# Altium PCB FlowSense-TX.PcbDoc
Units mil, origin at the board's own origin, x right, y up, seen from the top; angles counter-clockwise.
Board outline 1180 x 1005 mil, 2 copper layers (L1, L2), stack 62.8 mil thick; 40 components, 27 nets, 157 pads, 25 vias.
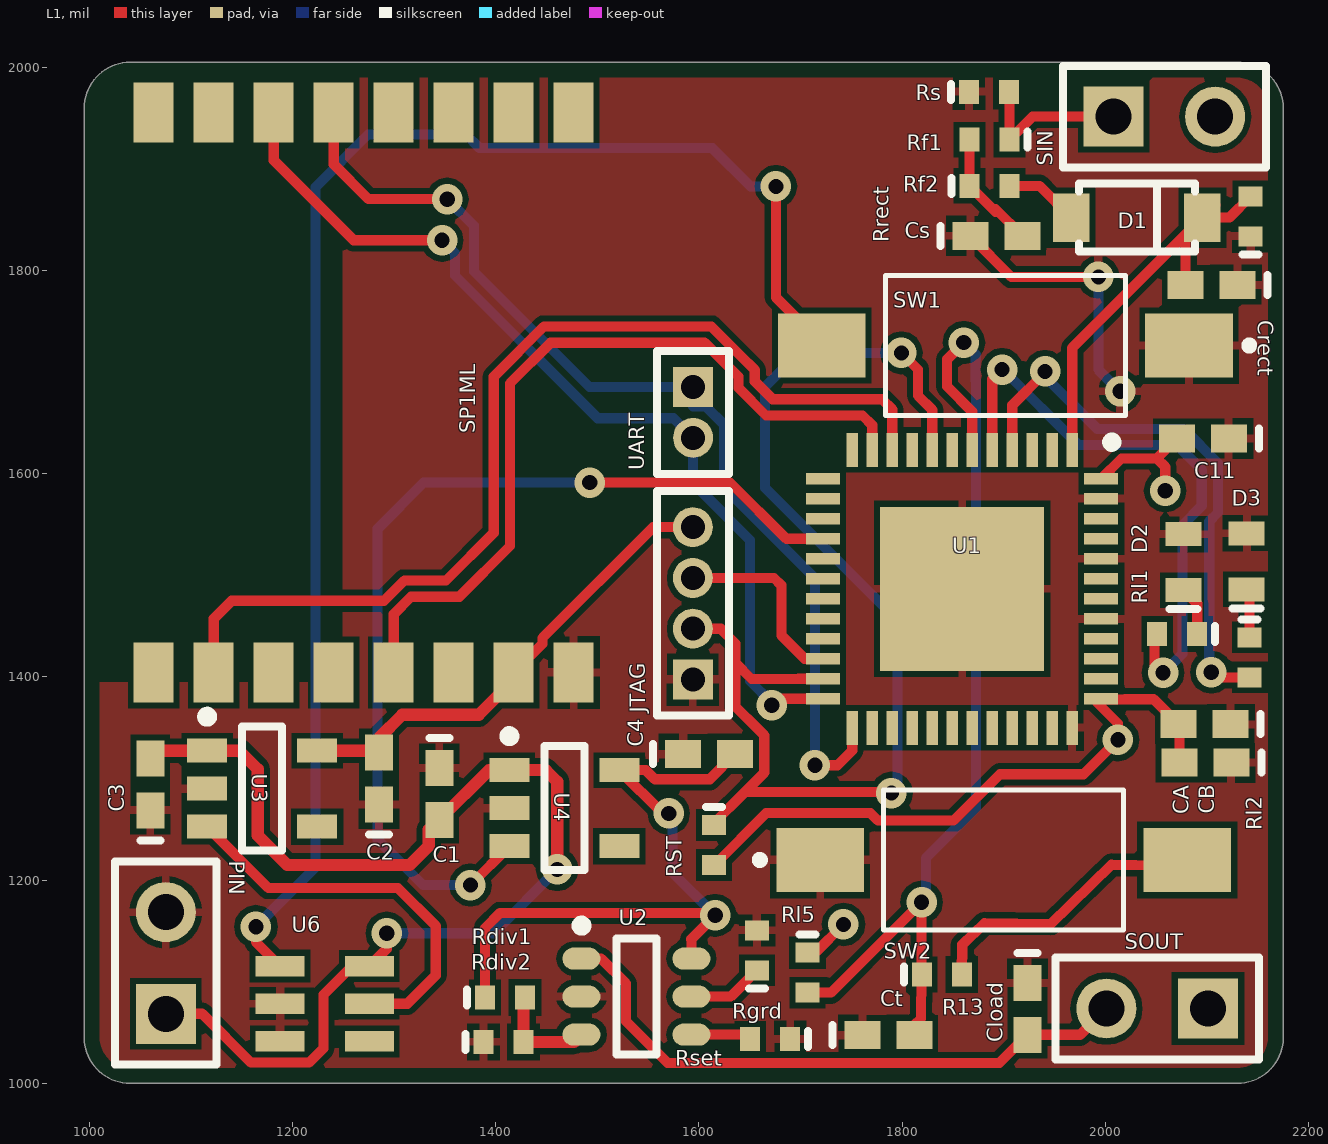
[diagram p0: L1 view]
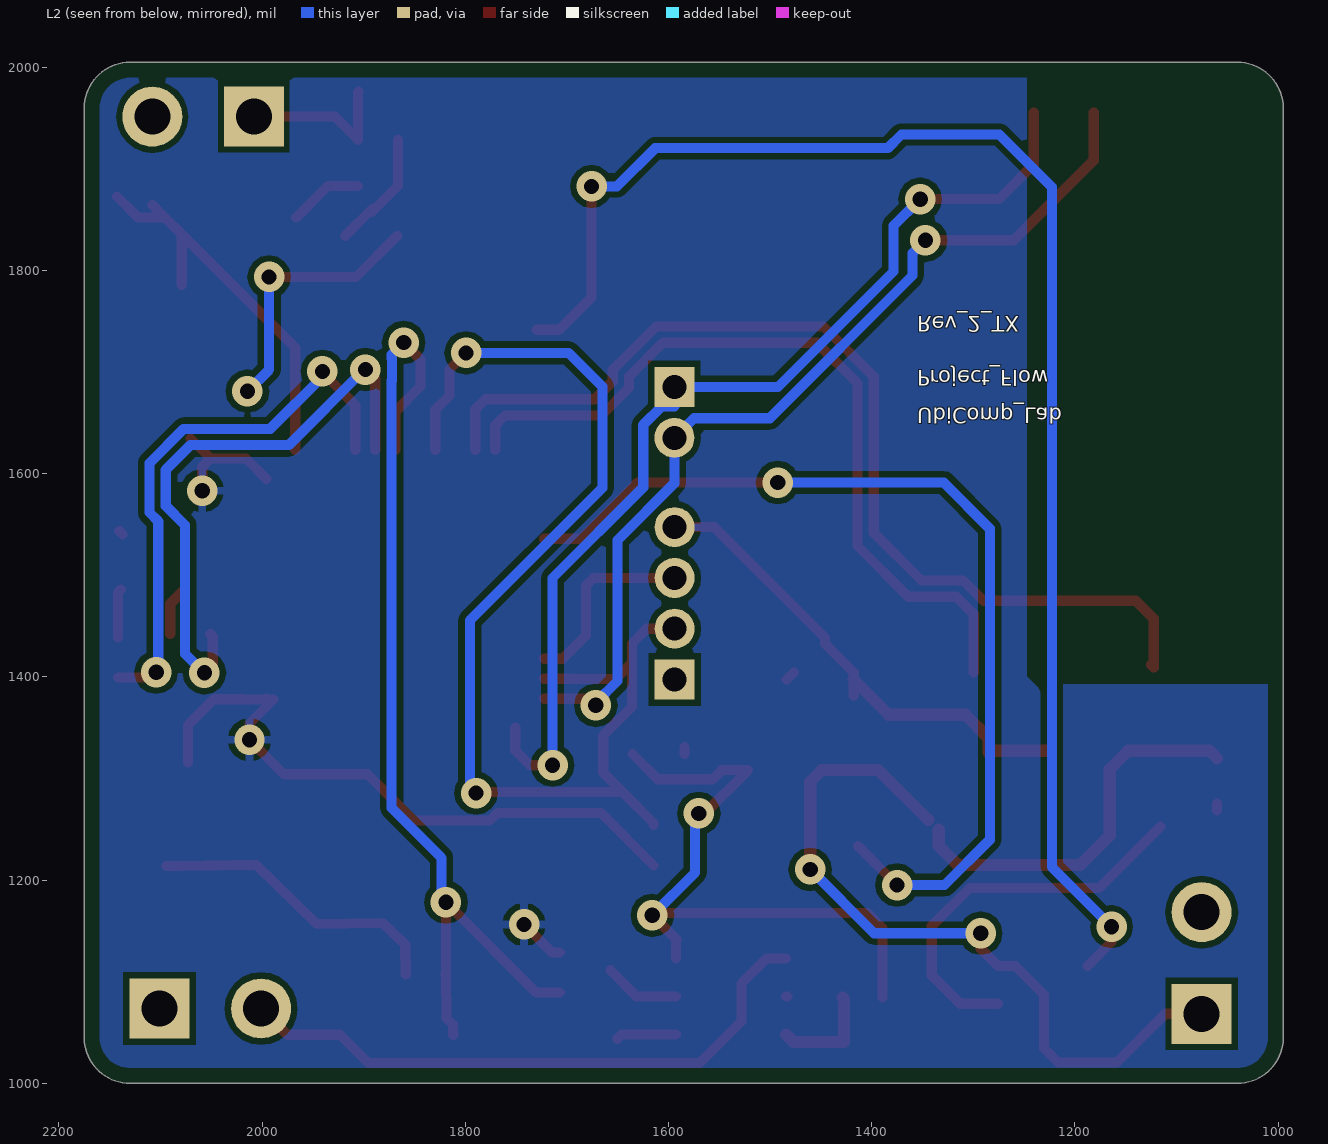
[diagram p1: L2 view, seen from below]

## Layer stack, top to bottom
Top Solder: solder mask 0.1, Solder Resist, Dk 0
L1: signal copper 1.4
Core: dielectric 60, FR-4, Dk 4.6
L2: signal copper 1.4
Bottom Solder: solder mask 0.1, Solder Resist, Dk 0

## Board outline
1040,1000 cw(c1040,1045) 995,1045 995,1960 cw(c1040,1960) 1040,2005 2130,2005 cw(c2130,1960) 2175,1960 2175,1045 cw(c2130,1045) 2130,1000

## Design rules (kind name [scope] priority, off if disabled: settings)
BoardOutlineClearance [All] p1: gap=15 ignorepadtopadclearanceinfootprint=FALSE
Clearance [All] p1: gap=6 ignorepadtopadclearanceinfootprint=FALSE except(0: Arc-Hole Track-Hole SMDPad-Hole THPad-Hole Via-Hole Fill-Hole Poly-Hole Region-Hole Text-Hole)
ComponentClearance [All] p1: gap=1 collisioncheckmode=3 verticalgap=1 showdistances=FALSE
DiffPairsRouting [All] p1: maxlimit=393.7 minlimit=6 mostfreqgap=8 toplayer_minwidth=6 toplayer_maxwidth=15 toplayer_prefwidth=8 bottomlayer_minwidth=6 bottomlayer_maxwidth=15 bottomlayer_prefwidth=8 maxuncoupledlength=500
HoleSize [All] p1: absolutevalues=TRUE maxlimit=265 minlimit=10 maxpercent=80.000 minpercent=20.000
HoleToHoleClearance [All] p1: gap=10 allowstackedmicrovias=FALSE
MinimumAnnularRing [All] p1: minimumring=7
MinimumSolderMaskSliver [All] p1: minsoldermaskwidth=0
PlaneClearance [All] p1: clearance=10
PlaneConnect [All] p1: planeconnectstyle=Direct reliefexpansion=16 reliefentries=4 reliefconductorwidth=6 reliefairgap=6
PolygonConnect [All] p1: connectstyle=Relief reliefconductorwidth=8 reliefentries=4 polygonreliefangle="90 Angle" airgapwidth=6
RoutingCorners [All] p1: cornerstyle=45-Degree minsetback=49.21 maxsetback=49.21
RoutingVias [All] p1: holewidth=15 width=30 viastyle="Through Hole" minholewidth=13 minwidth=27 maxholewidth=100 maxwidth=114
SilkToSilkClearance [All] p1: silktosilkclearance=0
SilkToSolderMaskClearance [IsPad] p1: minsilkscreentomaskgap=1 clearancetoexposedcopper=TRUE
SolderMaskExpansion [All] p1: expansion=2.95
Width [All] p1: maxlimit=400 minlimit=6 preferedwidth=8
20 further rules are at their usual default settings.

## Classes and differential pairs
component class peripheral: C1 C2 C3 C4 Cload Crect Cs D1 PIN Rdiv1 Rdiv2 Rf1 Rf2 Rgrd Rrect Rs Rset SIN SOUT SP1ML SW1 U2 U3 U4 U6 UART
component class MSP430: C11 CA CB Ct D2 D3 JTAG R13 Rl1 Rl2 Rl5 RST SW2 U1

## Components (designator, comment, footprint, x,y, rotation, side; value= is the part's Value field where it differs from the comment)
C1 "Cap" 0402-W 1344.4,1285 r270 top value=1u
C2 "Cap" 0402-W 1285,1300 r90 top value=100pF
C3 "Cap" 0402-W 1060,1294.41 r90 top value=1u
C4 "Cap" 0402-W 1609.91,1324.2 r0 top value=2.2u
C11 "Cap" 0402-W 2096,1634.7 r180 top value=4.7uF
CA "Cap" 0402-W 2098.41,1315.7 r180 top value=10u
CB "Cap" 0402-W 2097.7,1353.5 r180 top value=0.1u
Cload "Cap" 0402-W 1923.3,1073.4 r270 top value=100pF
Crect "Cap" 0402-W 2104.61,1786 r180 top value=100pF
Cs "Cap" 0402-W 1892.6,1834.2 r0 top value=100pF
Ct "Cap" 0402-W 1786.3,1047.6 r0 top value=0.1uF
D1 "Diode" "DIODE - SOD123" 2031,1852.1 r0 top
D2 "SML-311UTT86" 0603 2077,1513 r90 top
D3 "SML-311UTT86" 0603 2139,1513.8 r90 top
JTAG "MHDR1X4" MHDR1X4 1594,1397.5 r90 top
PIN "Header 2" HDR1X2 1075.2,1068.5 r90 top
R13 "Res" 0402 1839,1107.1 r0 top value=1k
Rdiv1 "Res" 0402 1409.09,1084.5 r0 top value=0
Rdiv2 "Res" 0402 1407.6,1040.8 r0 top value=0
Rf1 "Res" 0402 1885.91,1928.8 r180 top value=DNP
Rf2 "Res" 0402 1885.91,1883.4 r0 top value=DNP
Rgrd "Res" 0402 1657.1,1131 r90 top value=0
Rl1 "Res" 0402 2070.7,1442.4 r180 top value=470
Rl2 "Res" 0402 2142,1419.3 r270 top value=470
Rl5 "Res" 0402 1706.8,1109 r270 top value=4.7k
Rrect "Res" 0402 2142.8,1853.3 r90 top value=1k
Rs "Res" 0402 1885.4,1976 r0 top value=100k
Rset "Res" 0402 1670.12,1043.8 r180 top value=10k
RST "Res" 0402 1614.7,1234.6 r270 top
SIN "Header 2" HDR1X2 2008.1,1951.5 r0 top
SOUT "Header 2" HDR1X2 2101,1073.7 r180 top
SP1ML "SP1ML-868" STM_SP1ML-868 1270,1680 r90 top locked
SW1 "FSMSM _1437566-3_" TE_FSMSM 1901.59,1726.2 r180 top
SW2 "FSMSM _1437566-3_" TE_FSMSM 1899.9,1219.9 r0 top
U1 "MSP430 Wolverine 48-Pin" MSP_QFN48_RGZ_PAD0 1859.1,1486.8 r270 top locked
U2 "LTC6906" "6-Lead Plastic TSOT-23" 1538.4,1085.4 r0 top
U3 "TPS709" SOT95P280X145-5N 1170,1290 r0 top
U4 "TPS709" SOT95P280X145-5N 1467.5,1270.9 r0 top
U6 "MAX16054AZTT" 21-0114C 1231.6,1078.4 r0 top
UART "MHDR1X2" MHDR1X2 1594.2,1685.4 r270 top

## Footprints (in the part's own frame and the unit in brackets; to place one, negate y for a bottom-side part, rotate by r counter-clockwise, add the part's x,y. Pads: shape width x height; smd on the part's side, far side on the other; paste and mask are expansions set on the pad)
"6-Lead Plastic TSOT-23" [mm] "TSOP, 6-Leads, Body 2.90x1.63mm, Pitch 0.95mm, IPC Medium Density"
  oval 0.95x0.55 smd: 1(-1.375,0.95) 2(-1.375,0) 3(-1.375,-0.95) 4(1.375,-0.95) 5(1.375,0) 6(1.375,0.95)
  silkscreen extent -1.5,-1.45 0.5,1.9, body extent -0.9,-1.45 0.9,1.45, height 1
21-0114C [mil]
  rect 48x20 smd: 1(-44,37) 2(-44,0) 3(-44,-37) 4(44,-37) 5(44,0) 6(44,37)
0402 [mm] "Surface Mount; Body 1 x 0.5 mm (LxW typ)"
  rect 0.5x0.6 smd: 1(-0.5,0) 2(0.5,0)
  silkscreen extent -0.95,-0.2 -0.95,0.2, body extent -0.5,-0.25 0.5,0.25, height 0.5
0402-W [mm] "Surface Mount - Wide; Body 1.0 x 0.5 mm (LxW typ)"
  rect 0.9x0.7 smd: 1(-0.65,0) 2(0.65,0)
  silkscreen extent -1.4,-0.25 -1.4,0.25, body extent -0.5,-0.25 0.5,0.25, height 0.5
0603 [mm] "Surface Mount; Body 1.6 x 0.8 mm (LxW typ)"
  rect 0.6x0.9 smd: 1(-0.7,0) 2(0.7,0)
  silkscreen extent -1.17,-0.35 -1.17,0.35, body extent -0.8,-0.4 0.8,0.4, height 0.8
"DIODE - SOD123" [mil] "SOD-123; 2 Leads; Body 2.7 x 1.6 mm, (LxW)"
  rect 36x48 smd: 1(-64.5,0) 2(64.5,0)
  silkscreen extent -57,-33 57,33, body extent -57,-33 57,33, height 91
HDR1X2 [mm] "Connector; Header; 2 Position"
  rect 1.5x1.5 hole 0.9: 1(0,0)
  round 1.5 hole 0.9: 2(2.54,0)
  silkscreen extent -1.27,-1.27 3.81,1.27
MHDR1X2 [mm] "Connector; Header; 2 Position"
  rect 1x1 hole 0.6: 1(0,0)
  round 1 hole 0.6: 2(1.27,0)
  silkscreen extent -0.9,-0.9 2.17,0.9
MHDR1X4 [mm] "Connector; Header; 4 Position"
  rect 1x1 hole 0.6: 1(0,0)
  round 1 hole 0.6: 2(1.27,0) 3(2.54,0) 4(3.81,0)
  silkscreen extent -0.9,-0.9 4.71,0.9
MSP_QFN48_RGZ_PAD0 [mm]
  rect 4.1x4.1 smd: 0(0,0)
  rect 0.85x0.28 smd: 1(-3.475,2.75) 2(-3.475,2.25) 3(-3.475,1.75) 4(-3.475,1.25) 5(-3.475,0.75) 6(-3.475,0.25) 7(-3.475,-0.25) 8(-3.475,-0.75) 9(-3.475,-1.25) 10(-3.475,-1.75) 11(-3.475,-2.25) 12(-3.475,-2.75) 25(3.475,-2.75) 26(3.475,-2.25) 27(3.475,-1.75) 28(3.475,-1.25) 29(3.475,-0.75) 30(3.475,-0.25) 31(3.475,0.25) 32(3.475,0.75) 33(3.475,1.25) 34(3.475,1.75) 35(3.475,2.25) 36(3.475,2.75)
  rect 0.28x0.85 smd: 13(-2.75,-3.475) 14(-2.25,-3.475) 15(-1.75,-3.475) 16(-1.25,-3.475) 17(-0.75,-3.475) 18(-0.25,-3.475) 19(0.25,-3.475) 20(0.75,-3.475) 21(1.25,-3.475) 22(1.75,-3.475) 23(2.25,-3.475) 24(2.75,-3.475) 37(2.75,3.475) 38(2.25,3.475) 39(1.75,3.475) 40(1.25,3.475) 41(0.75,3.475) 42(0.25,3.475) 43(-0.25,3.475) 44(-0.75,3.475) 45(-1.25,3.475) 46(-1.75,3.475) 47(-2.25,3.475) 48(-2.75,3.475)
  silkscreen extent -3.78,3.63 -3.55,3.85, body extent -3.3,-3.3 3.3,3.3, height 1
SOT95P280X145-5N [mm] "SOT23, 5-Leads, Body 2.90x2.80mm, Pitch 0.95mm, IPC Medium Density"
  rect 1x0.6 smd: 1(-1.375,0.95) 2(-1.375,0) 3(-1.375,-0.95) 4(1.375,-0.95) 5(1.375,0.95)
  silkscreen extent -1.5,-1.55 0.5,1.92, body extent -0.88,-1.52 0.87,1.53, height 1.45
STM_SP1ML-868 [mm]
  rect 1.5x1 smd: 1(-7,5.25) 2(-7,3.75) 3(-7,2.25) 4(-7,0.75) 5(-7,-0.75) 6(-7,-2.25) 7(-7,-3.75) 8(-7,-5.25) 9(7,-5.25) 10(7,-3.75) 11(7,-2.25) 12(7,-0.75) 13(7,0.75) 14(7,2.25) 15(7,3.75) 16(7,5.25)
TE_FSMSM [mm]
  rect 2.19x1.6 smd: 1(-4.59,0) 2(4.59,0)
  silkscreen extent -6.2,-1.75 3,1.75

## Part data
C1 C2 C3 C4 C11 CA CB Cload Crect Cs Ct: "Ceramic Capacitor (Surface Mount)", Manufacturer="Generic Ceramic Chip Cap (TBD)"
D1: "General Purpose Diode"
D2 D3: "LED 630NM RED WTR CLR 0603 SMD"
JTAG: "Header, 4-Pin", LatestRevisionDate=17-Jul-2002, LatestRevisionNote="Re-released for DXP Platform.", Publisher="Altium Limited"
PIN SIN SOUT UART: "Header, 2-Pin", LatestRevisionDate=17-Jul-2002, LatestRevisionNote="Re-released for DXP Platform.", Publisher="Altium Limited"
R13 Rdiv1 Rdiv2 Rf1 Rf2 Rgrd Rl1 Rl2 Rl5 Rrect Rs Rset RST: "Chip Resistor (Surface Mount)", Manufacturer="Generic Chip Res (TBD)"
  RST: RST=4.7k
SP1ML: "RF TXRX MODULE ISM<1GHZ CHIP ANT", Package="SMD-16 STMicroelectronics", Availability=Good, MF=STMicroelectronics, MP=SP1ML-868, Price="16.88 USD"
SW1 SW2: library part FSMSM, "FSMSM=3.5X6 SMT TACT", Package=None, Availability=Unavailable, MF="TE Connectivity", MP=FSMSM, Price=None, SnapEDA_Link=https://www.snapeda.com/parts/FSMSM/TE%20Connectivity%20/%20DEUTSCH/view-part/?ref=snap
U1: library part MSP430FR596X_586X_RGZ, "16-bit FRAM MCU"
U2: "LP Oscilloter"
U3 U4: "Ultra low power Voltage Regulator"
U6: "On/Off Controller With Debounce And +/-1", Package="TSOT-23 Maxim Integrated", Availability=Unavailable, MF="Maxim Integrated", MP=MAX16054AZT+, Price="2.94 USD", SnapEDA_Link=https://www.snapeda.com/parts/MAX16054AZT%2B/Maxim%20Integrated/view-part/?ref=snap

## Via types
v1: diameter 30, hole 15, L1 to L2, 25 vias

## Nets (pads, with @x,y where several pads share a name; then routed paths per layer and width w, separated by ;. In a path a pad name is that pad's centre, name@x,y a point inside that pad or via, vN(x,y) a via of type N, cw(c..) or ccw(c..) an arc to the next point about the centre after c; other vN are vias at no path point)
GND: C1.1 C2.1 C3.1 C4.1 C11.1 CA.1 CB.1 Cload.1 Crect.1 Cs.1 Ct.1 D2.2 D3.2 JTAG.1 PIN.2 Rdiv2.1 Rgrd.2 Rrect.1 Rs.1 Rset.1 SP1ML.8 SW1.1 SW2.1 U1.0 U1.36 U1.41 U1.44 U1.47 U2.2 U3.2 U4.2 U6.2 U6.3 | length 306.9
  L1 w10: C3.1 C3.1@1060,1275.41 ; SP1ML.8 SP1ML.8@1483.6,1397.5 ; U2.2@1482.93,1085.4 U2.2 ; C4.1 C4.1@1584.32,1331.11 ; JTAG.1@1584.32,1387.82 JTAG.1 ; Cs.1 1907.51,1793.7 v1(1993.1,1793.7) ; D3.2@2137.46,1540.56 D3.2@2140.6,1543.7
  L2 w10: v1(1993.1,1793.7) 1993.1,1702.5 2014.3,1681.3 v1(2014.4,1681.3)
NetC1_2: C1.2 C3.2 PIN.1 U3.1 U4.1 U6.6 | length 1172.5
  L1 w10: PIN.1 1110.94,1068.5 1159.04,1020.4 1216.16,1020.4 1230.4,1034.64 1230.4,1087.4 1258.4,1115.4 U6.6 1292.7,1132.5 v1(1292.7,1147.8)
  L1 w12: PIN.1@1055,1060 PIN.1@1080,1085 ; C3.2 1067.4,1327.4 U3.1 1147.6,1327.4 1165.7,1309.3 1165.7,1244 1194.7,1215 1315.3,1215 1334.07,1233.77 C1.2@1334.07,1249.98 ; C1.2 1393.29,1308.3 U4.1 1449.1,1308.3 1460.5,1296.9 v1(1460.5,1210.6)
  L2 w10: v1(1292.7,1147.8) 1397.7,1147.8 v1(1460.5,1210.6)
NetCs_2: Cs.2 Rf1.2 Rf2.1 | length 121.6
  L1 w10: Rf1.2 Rf2.1 1891.8,1857.83 1891.8,1860.59 Cs.2
NetCt_2: Ct.2 R13.1 Rl5.2 U1.6 | length 983.6
  L1 w10: Rl5.2 1730.01,1089.31 v1(1819.05,1178.35) R13.1@1819.05,1107.1 ; Ct.2 1812.04,1057.67 1818.41,1063.85 R13.1@1819.05,1107.1 ; R13.1 R13.1@1819.05,1107.1 ; v1(1860.7,1729.2) 1844.2,1712.7 1844.2,1685.9 1868.94,1661.16 U1.6
  L2 w10: v1(1819.05,1178.35) 1823.4,1182.7 1823.4,1222 1872.5,1271.1 1872.5,1691.63 1872.3,1691.83 1872.3,1713.37 1872.5,1713.57 1872.5,1717.4 v1(1860.7,1729.2)
NetD1_1: D1.1 Rf2.2 | length 73.9
  L1 w10: Rf2.2 1935.2,1883.4 D1.1
NetD2_1: D2.1 Rl1.1 | length 48.6
  L1 w10: D2.1 2090.39,1472.06 Rl1.1
NetD3_1: D3.1 Rl2.1 | length 48.5
  L1 w10: D3.1 2142,1483.24 Rl2.1
NetR13_2: R13.2 SW2.2 | length 297
  L1 w10: R13.2 1859.12,1136.51 1881.01,1157.76 1945.93,1156.8 2006.08,1215.21 2080.52,1214.11 SW2.2@2094.4,1213.9
NetRdiv1_2: Rdiv1.2 Rdiv2.2 U2.3 | length 104.3
  L1 w12: Rdiv1.2 1427.29,1083.02 Rdiv2.2 1477.07,1040.8 U2.3
NetRgrd_1: Rgrd.1 U2.5 | length 75.3
  L1 w10: U2.5 1631.18,1085.4 Rgrd.1
NetRl1_2: Rl1.2 U1.5 | length 579.4
  L1 w10: U1.5 1888.63,1693.23 1898,1702.6 v1(1898.3,1702.6) ; Rl1.2 2048.5,1439.89 2048.5,1412.1 2056.5,1404.1 v1(2056.8,1404.1)
  L2 w10: v1(1898.3,1702.6) 1899.3,1702.6 1973.7,1628.2 2070.58,1628.2 2094.9,1603.88 2094.9,1568.49 2075.9,1549.49 2075.9,1422.9 2057.1,1404.1 v1(2056.8,1404.1)
NetRl2_2: Rl2.2 U1.4 | length 552.6
  L1 w10: U1.4 1908.31,1667.41 1940.6,1699.7 v1(1940.6,1700.8) ; v1(2104.3,1404.7) 2105.7,1406.1 2112.19,1399.61 Rl2.2
  L2 w10: v1(1940.6,1700.8) 1940.6,1695.6 1992,1644.2 2077.2,1644.2 2110.9,1610.5 2110.9,1561.86 2102.2,1553.16 2102.2,1406.8 v1(2104.3,1404.7)
NetRset_2: Rset.2 U2.4 | length 59.6
  L1 w10: U2.4 1646.23,1048 Rset.2
NetSP1ML_2: SP1ML.2 U1.10 | length 1008.8
  L1 w10: SP1ML.2@1125,1412.05 1122.36,1409.41 1122.36,1457.36 1140,1475 1290,1475 1310,1495 1351,1495 1398,1542 1398,1695.63 1447.37,1745 1612.15,1745 1640.89,1716.27 1654.88,1702.28 1654.88,1691.15 1672.62,1673.4 1780.2,1673.4 1790.2,1663.4 U1.10
NetSP1ML_5: SP1ML.5 U1.11 | length 797.2
  L1 w10: SP1ML.5 1299.53,1461.9 1316.63,1479 1364,1479 1414,1529 1414,1689 1454,1729 1605.53,1729 1638.88,1695.65 1638.88,1684.52 1666,1657.4 1761,1657.4 1770.52,1647.89 U1.11
NetSP1ML_13: SP1ML.13 U1.25 UART.1 | length 1016.3
  L1 w10: SP1ML.13 1240.47,1904.53 1274.7,1870.3 v1(1352.3,1870.3) ; v1(1714.1,1313.2) 1736.4,1313.2 1750.83,1327.63 U1.25
  L2 w10: v1(1352.3,1870.3) 1378.5,1844.1 1378.5,1799.13 1492.23,1685.4 UART.1 1594.2,1666.09 1606.91,1666.09 1624.89,1648.11 1624.89,1586.71 1714.1,1497.5 v1(1714.1,1313.2)
NetSP1ML_14: SP1ML.14 U1.24 UART.2 | length 936.5
  L1 w10: SP1ML.14 1181.42,1908.58 1260.2,1829.8 v1(1347.1,1829.8) ; v1(1671.6,1372.1) 1671.6,1375.26 1671.5,1375.36 1674.67,1378.53 U1.24
  L2 w10: v1(1347.1,1829.8) 1359.9,1817 1359.9,1795.1 1500.29,1654.71 1574.89,1654.71 UART.2 1594.2,1590.7 1650.2,1534.7 1650.2,1396 1671.6,1374.6 v1(1671.6,1372.1)
NetSW1_2: SW1.2 U6.1 | length 1473
  L1 w10: v1(1163.9,1154.2) 1163.9,1139.1 U6.1 ; v1(1675.7,1882.8) 1675.7,1773.78 1707.68,1741.8 SW1.2@1729.79,1741.8
  L2 w10: v1(1163.9,1154.2) 1222.7,1213 1222.7,1882.3 1274.3,1933.9 1370.72,1933.9 1384.12,1920.5 1613.2,1920.5 1650.9,1882.8 v1(1675.7,1882.8)
NetU1_16: U1.16 U4.3 | length 960.8
  L1 w10: v1@1364.8,1195.2 v1(1375.07,1195.2) U4.3 ; v1(1492.5,1591.4) 1630.6,1591.4 1685.99,1536.01 U1.16
  L2 w10: v1(1375.07,1195.2) 1328.3,1195.2 1283.7,1239.8 1283.7,1546 1329.1,1591.4 v1(1492.5,1591.4)
NetU3_3: U3.3 U6.5 | length 390.9
  L1 w10: U3.3 1176.16,1192.3 1303.6,1192.3 1340.9,1155 1340.9,1106.5 1312.8,1078.4 U6.5
OSC_OSC: Cload.2 SOUT.2 U2.1 | length 603.4
  L1 w10: U2.1 1503.7,1122.8 1528.1,1098.4 1528.1,1061.1 1569.2,1020 1895.49,1020 Cload.2 1975.11,1047.81 SOUT.2
Rect_voltage: Crect.2 D1.2 Rrect.2 U1.1 | length 405
  L1 w10: U1.1 1967.37,1723.97 D1.2@2079.02,1835.62 ; Crect.2 D1.2@2079.02,1835.62 ; D1.2@2108.1,1864.7 D1.2 ; Rrect.2 2121.91,1852.1 D1.2 ; D1.2@2079.02,1835.62 D1.2
RST: JTAG.2 RST.1 U1.8 U1.23 | length 1218.8
  L1 w10: JTAG.2 1621.37,1447.5 1635.89,1432.98 1635.89,1413.89 ; RST.1 1614.7,1256.35 1644.05,1285.7 ; 1651.71,1398.07 1635.89,1413.89 ; 1651.73,1398.1 1682.37,1398.1 ; 1682.4,1398.07 1697.69,1398.07 1697.84,1398.22 U1.23 ; v1(1789.4,1285.7) 1788.4,1286.7 1645.05,1286.7 1664.22,1305.86 1664.22,1342.54 1657.77,1348.98 1635.89,1370.84 1635.89,1413.89 ; v1(1799.2,1719) 1815.6,1702.6 1815.6,1676.9 1829.57,1662.93 U1.8
  L2 w10: v1(1789.4,1285.7) 1790.2,1285.7 1795.5,1280.4 1795.5,1455.6 1665,1586.1 1665,1685.6 1698.4,1719 v1(1799.2,1719)
SENSE: Rf1.1 Rs.2 SIN.1 | length 159.3
  L1 w10: Rs.2 1905.6,1975.49 Rf1.1 1928.3,1951.5 SIN.1
TEST: JTAG.3 U1.22 | length 190.1
  L1 w10: JTAG.3 1673.89,1497.5 1681.1,1490.29 1681.1,1440.98 1704.18,1417.9 U1.22
VCC_3.3: C2.2 C11.2 CA.2 CB.2 JTAG.4 Rl5.1 RST.2 SP1ML.7 U1.37 U1.48 U3.5 | length 1304.8
  L1 w10: SP1ML.7@1417.64,1381.86 1417.64,1397.28 SP1ML.7 1446.01,1432.78 1446.01,1438.49 1555.01,1547.5 JTAG.4 ; RST.2@1614.7,1214.51 1666.29,1266.1 1768.7,1266.1 1776.05,1258.75 1850.65,1258.75 1896.2,1304.3 1978.5,1304.3 v1(2012.4,1338.2) ; Rl5.1 1714.48,1128.68 v1(1742.2,1156.4) ; U1.37 U1.37@1996.64,1377.8 ; U1.48 2015.82,1614.98 2050.69,1614.98 ; v1@2012.9,1337.7 v1(2012.4,1338.2) ; 2019.4,1378.1 2019.7,1378.1 ; v1(2058.9,1583.4) 2058.9,1606.77 2050.69,1614.98 ; C11.2 2050.69,1614.98 ; CA.2 2072.82,1352.79 CB.2 2047.51,1378.1 2019.7,1378.1 ; U1.37@1996.64,1377.8 1988.84,1377.8 2012.4,1354.24 v1(2012.4,1338.2) ; U1.37@1996.64,1377.8 2019.4,1377.8 2019.7,1378.1
  L1 w12: U3.5 1283.19,1327.4 C2.2 1285,1340 1307.88,1362.88 1383.24,1362.88 SP1ML.7@1417.64,1397.28
VCC_5: C4.2 Rdiv1.1 U2.6 U4.5 | length 667.9
  L1 w10: Rdiv1.1 1389.4,1152.9 1404.3,1167.8 1613.5,1167.8 v1(1615.9,1165.4) 1592.3,1141.8 1592.53,1141.8 U2.6 ; v1(1570.16,1265.74) 1564.2,1265.74 U4.5 1547.73,1308.3 1556.61,1299.42 1610.72,1299.42 C4.2
  L2 w10: v1(1570.16,1265.74) 1573.8,1262.1 1573.8,1207.5 v1(1615.9,1165.4)
pads on no net: SIN.2 SOUT.1 SP1ML.1 SP1ML.3 SP1ML.4 SP1ML.6 SP1ML.9 SP1ML.10 SP1ML.11 SP1ML.12 SP1ML.15 SP1ML.16 U1.2 U1.3 U1.7 U1.9 U1.12 U1.13 U1.14 U1.15 U1.17 U1.18 U1.19 U1.20 U1.21 U1.26 U1.27 U1.28 U1.29 U1.30 U1.31 U1.32 U1.33 U1.34 U1.35 U1.38 U1.39 U1.40 U1.42 U1.43 U1.45 U1.46 U3.4 U4.4 U6.4

## Polygon pours and split planes (outlines as drawn)
VCC_3.3 on L2 "L2-VCC_3.3" (solid, pour order 4): 1247.5,1996 1247.5,1400.9 1236.2,1389.6 1233.1,1392.7 992.9,1392.7 992.9,989.8 1013.4,969.3 2204.6,969.3 2204.6,1958.2 2131,2031.8 2128.9,2029.7 1970.4,2029.7
GND on L1 "L1-No Net" (solid, remove dead copper, pour order 2): 1243.5,1996 1249.47,1990.03 1249.47,1394.91 1001.09,1394.91 999.8,1396.2 985.9,1382.3 985.9,994.7 1008.7,994.7 1049.1,954.3 1059.2,964.4 2229.7,964.4 2229.7,2012.5 2244.8,2027.6 2239.8,2032.6 1246,2032.6

## Silkscreen, mask and mechanical layers (free items; w line width, h text height)
Bottom Overlay:
  text "Rev_2_TX" at 1355,1755 h15 r180
  text "Project_Flow" at 1355,1702.1 h15 r180
  text "UbiComp_Lab" at 1355,1665 h15 r180
Mechanical 1:
  the board outline again, w10